# EAGLE board LED-bas (EAGLE 7.6.0)
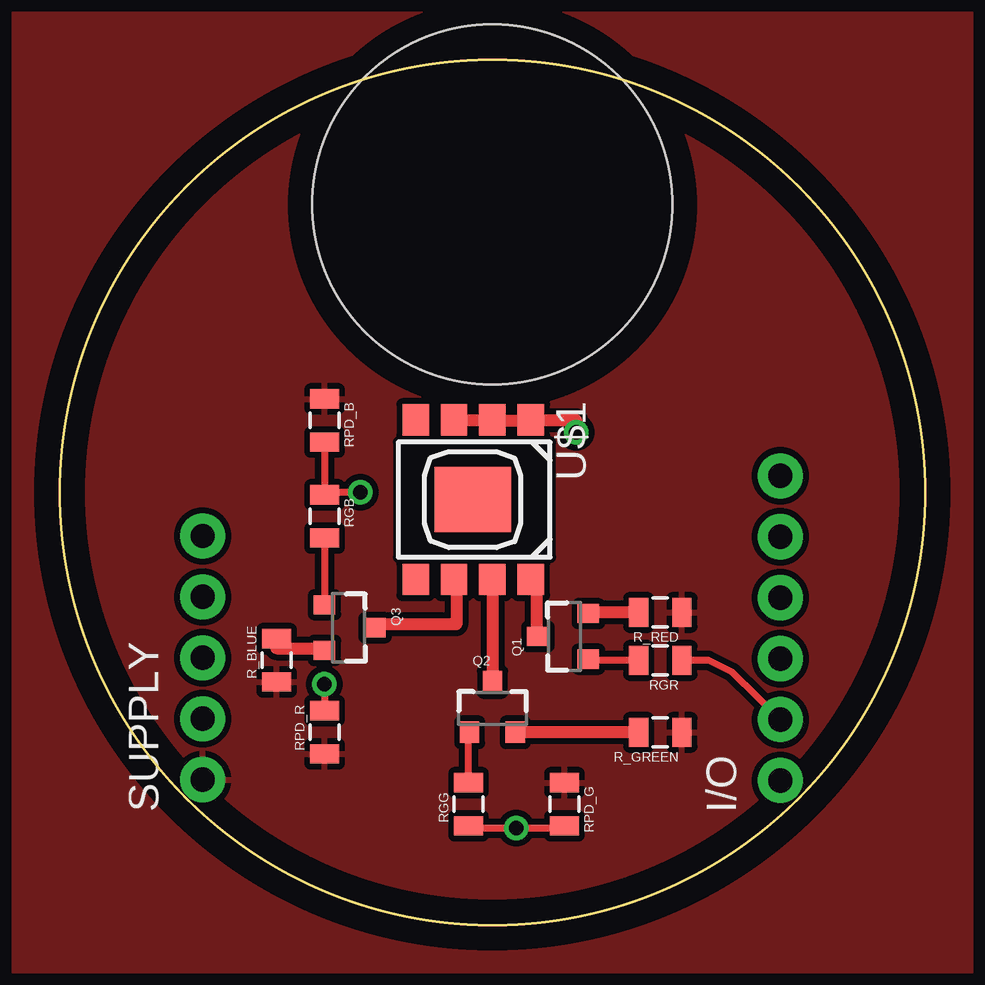
[diagram p0: board, top side]
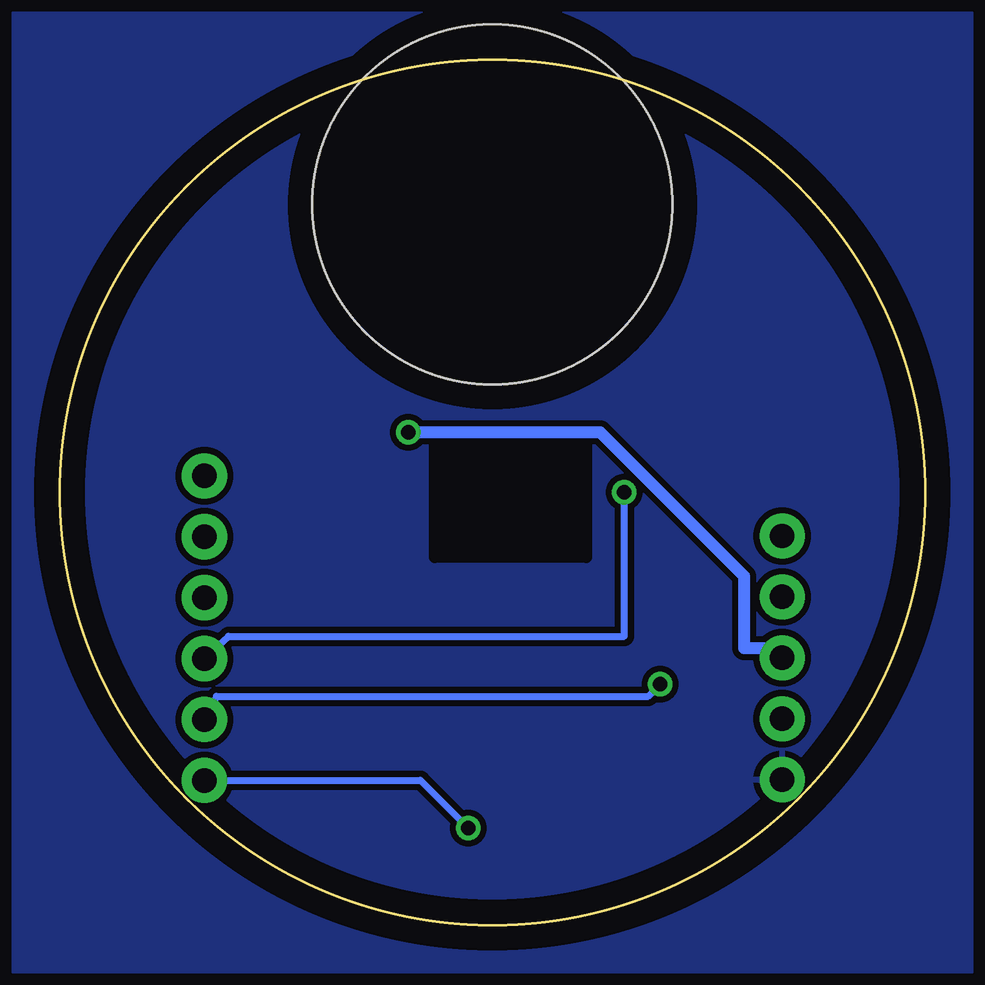
[diagram p1: board, bottom side, seen from below]

Size 36.06 x 36.06 mm. Coordinates in mm from the lower left corner, seen from the top.
Outline: circle at 18.03,18.03 radius 18.03
Copper layers (1*16): Top 0.035mm / dielectric 1.5mm / Bottom 0.035mm
Design rules "baballe": minimum track width 5mil, minimum drill 24mil, track to track 4mil, track to pad 4mil, pad to pad 4mil, via to via 4mil, smd to smd 2mil, copper to edge 40mil, drill to drill 8mil, minimum pad ring 10mil, minimum via ring 8mil, stop-mask expansion 4mil, vias tented up to drill 0mil, thermal gap 10mil
Net classes: 0 default: width 0.3 mm; 1 GND: width 0.5 mm, clearance 0.5 mm; 2 SUPPLY: width 0.5 mm, clearance 0.003 mm
Holes 15 mm at 18.03,30.03
tRestrict: area 14.1,15.3 to 20.4,20.1
bRestrict: area 14.1,15.3 to 20.4,20.1

## Footprints (pad centres in the part's own frame; a part is rotated, then mirrored left to right if it is on the bottom)
1X06_NO_SILK = drill 1.016 pad 1.88: 1 0,0; 2 2.54,0; 3 5.08,0; 4 7.62,0; 5 10.16,0; 6 12.7,0
SOT23-3 = smd 0.8 x 0.9: 1 -0.95,-1; 2 0.95,-1; 3 0,1.1
0805 = smd 0.8 x 1.2: 1 -0.9,0; 2 0.9,0
1X05_NO_SILK = drill 1.016 pad 1.88: 1 0,0; 2 2.54,0; 3 5.08,0; 4 7.62,0; 5 10.16,0
CLN6A = smd 1.3 x 1.1: 1 -3.325,1.6; 2 -3.325,0; 3 -3.325,-1.6; 4 -3.325,-3.2; 5 3.325,1.6; 6 3.325,0; 7 3.325,-1.6; 8 3.33,-3.2 | smd 2.7 x 3.2: HT 0,-0.821

## Placement (x,y rotation side)
I/O  I/O  [1X06_NO_SILK]  30.03,6.02 90 top
Q1  200mA/50V  [SOT23-3]  21.03,12.03 90 top
Q2  200mA/50V  [SOT23-3]  18.03,9.03 0 top
Q3  200mA/50V  [SOT23-3]  12.03,12.39 270 top
R_BLUE  10Kohm  [0805]  9.03,11.03 90 top
R_GREEN  10Kohm  [0805]  25.03,8.03 180 top
R_RED  10Kohm  [0805]  25.03,13.03 180 top
RGB  1KOhm  [0805]  11.03,17.03 270 top
RGG  1KOhm  [0805]  17.03,5.03 90 top
RGR  1KOhm  [0805]  25.03,11.03 180 top
RPD_B  10KOhm  [0805]  11.03,21.03 270 top
RPD_G  10KOhm  [0805]  21.03,5.03 270 top
RPD_R  10KOhm  [0805]  11.03,8.03 90 top
SUPPLY  SUPPLY  [1X05_NO_SILK]  5.95,6.05 90 top
U$1  [CLN6A]  18.03,17.73 270 top

## Library data of the parts
I/O = SparkFun-Connectors; PROD_ID: CONN-08437
Q1-Q3 = SparkFun-DiscreteSemi; PROD_ID: TRANS-00830
R_BLUE R_GREEN R_RED RGB RGG RGR RPD_B RPD_G RPD_R = SparkFun-Resistors
SUPPLY = SparkFun-Connectors
U$1 = led

## Nets
GND: R_BLUE.1 R_GREEN.1 R_RED.1 RPD_B.1 RPD_G.1 RPD_R.1 SUPPLY.1
N$1 [SUPPLY]: Q3.2 R_BLUE.2
N$2 [SUPPLY]: Q2.2 R_GREEN.2
N$3 [SUPPLY]: Q1.2 R_RED.2
N$4: Q2.1 RGG.2
N$5: Q1.1 RGR.2
N$6: Q3.1 RGB.2
N$7 [SUPPLY]: Q1.3 U$1.5
N$8 [SUPPLY]: Q2.3 U$1.6
N$9 [SUPPLY]: Q3.3 U$1.7
O_BLUE: I/O.3 RGB.1 RPD_B.2
O_GREEN: I/O.1 RGG.1 RPD_G.2
O_RED: I/O.2 RGR.1 RPD_R.2
V_IN [SUPPLY]: SUPPLY.3 U$1.1 U$1.2 U$1.3

## Tracks (layer width: path | path; a pad name or v marks a point on that pad's centre or on a via)
GND
  pour Top (isolate 0.254): -0.97,38.03 38.03,38.03 38.03,-1.97 -1.97,-1.97 -1.97,38.03
  pour Bottom (isolate 0.254): -0.97,38.03 38.03,38.03 38.03,-1.97 -1.97,-1.97 -1.97,38.03
N$1
  Top 0.5: Q3.2 11.03,11.53 9.03,11.53 R_BLUE.2 9.03,12.03
N$2
  Top 0.5: R_GREEN.2 Q2.2
N$3
  Top 0.5: R_RED.2 22.03,13.03 Q1.2
N$4
  Top 0.3: RGG.2 17.03,8.03 Q2.1
N$5
  Top 0.3: RGR.2 22.03,11.03 Q1.1
N$6
  Top 0.3: RGB.2 Q3.1
N$7
  Top 0.5: Q1.3 19.86,12.06 19.86,14.47 19.66,14.67 U$1.5
N$8
  Top 0.5: U$1.6 Q2.3
N$9
  Top 0.5: Q3.3 13.53,12.53 16.53,12.53 16.53,14.03 U$1.7
O_BLUE  (via drill 0.61)
  Top 0.3: RPD_B.2 11.03,18.03 | v12.53,18.03 11.03,18.03 | 11.03,18.03 RGB.1
  Bottom 0.3: v12.53,18.03 12.53,12.03 29.03,12.03 I/O.3
O_GREEN  (via drill 0.61)
  Top 0.3: RGG.1 17.03,4.03 v19.03,4.03 21.03,4.03 RPD_G.2
  Bottom 0.3: v19.03,4.03 21.03,6.03 29.53,6.03 I/O.1
O_RED  (via drill 0.61)
  Top 0.3: v11.03,10.03 RPD_R.2 | RGR.1 27.03,11.03 28.03,10.53 I/O.2
  Bottom 0.3: v11.03,10.03 11.53,9.53 29.53,9.53 I/O.2
V_IN  (via drill 0.61)
  Top 0.5: 18.03,21.03 16.53,21.03 U$1.3 | 18.03,21.03 19.53,21.03 U$1.1 20.03,21.03 21.53,21.03 v21.53,20.53 | 18.03,21.03 U$1.2
  Bottom 0.5: v21.53,20.53 13.53,20.53 7.53,14.53 7.53,11.53 6.03,11.53 SUPPLY.3